# EAGLE board POVnano (EAGLE 7.6.0)
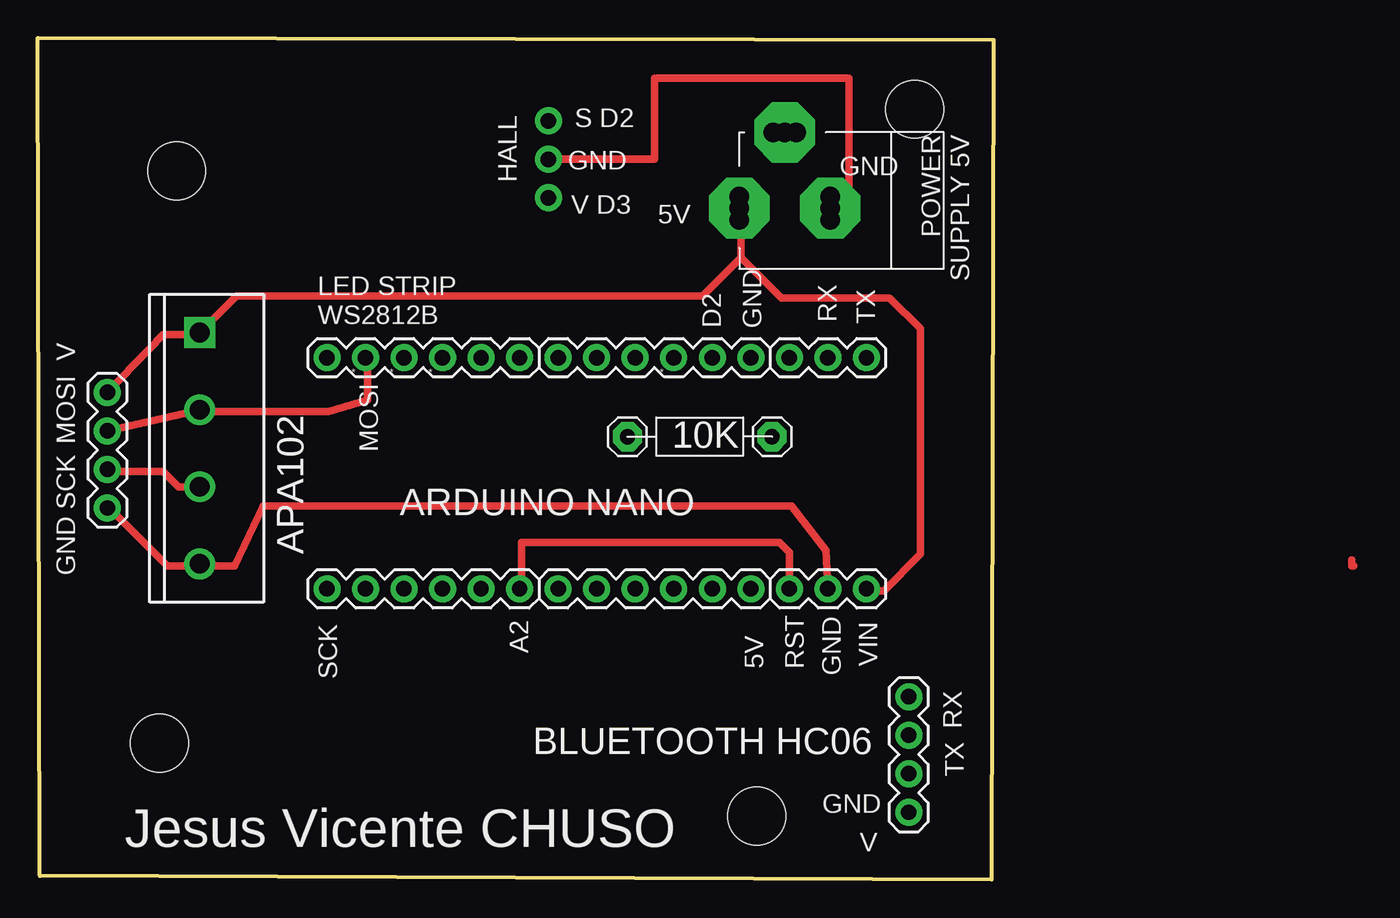
[diagram p0: board, top side]
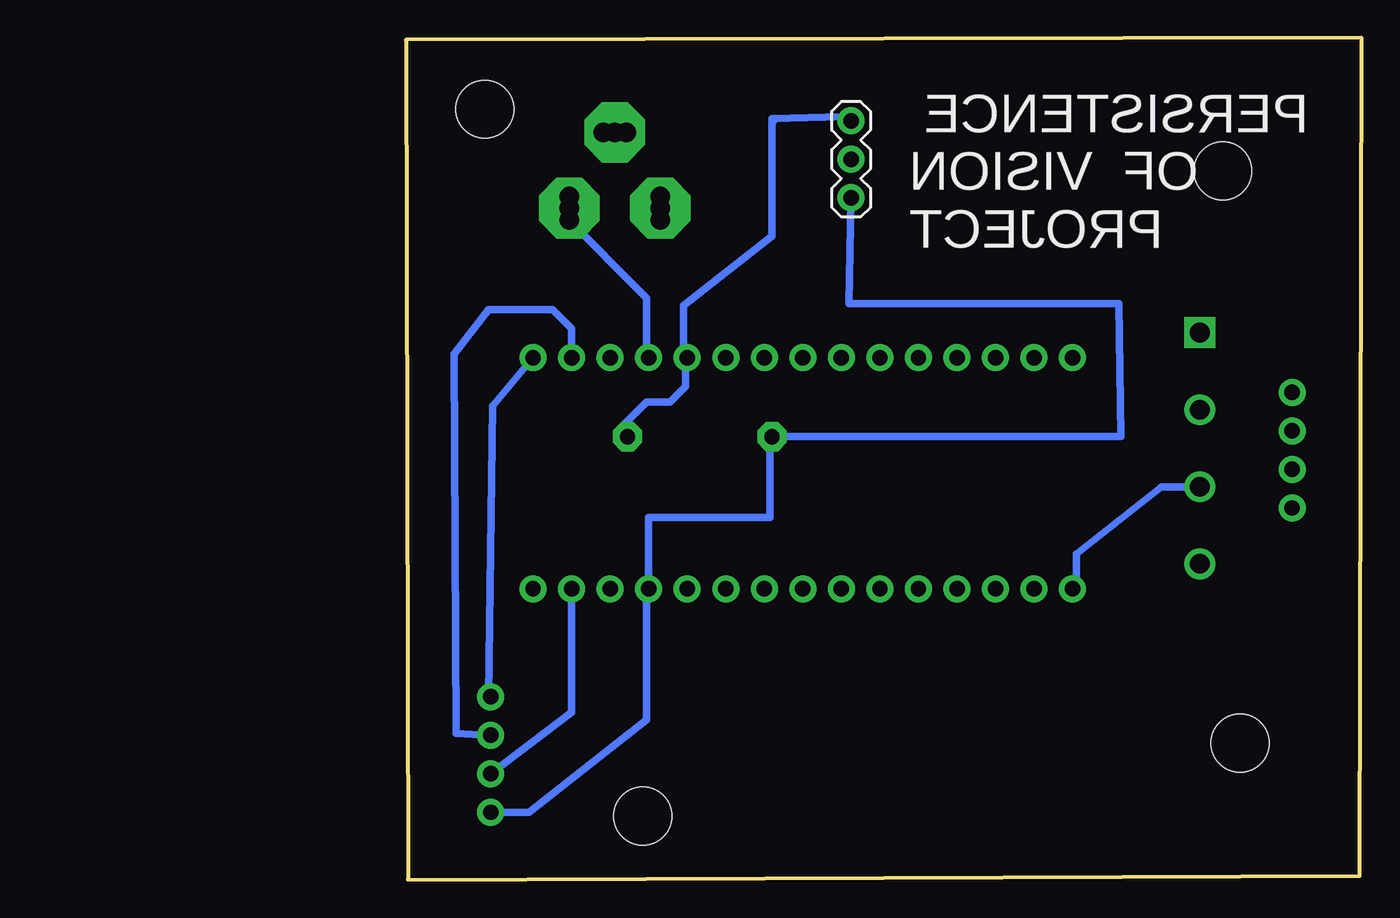
[diagram p1: board, bottom side, seen from below]

Size 62.99 x 55.5 mm. Coordinates in mm from the lower left corner, seen from the top.
Outline: 0,55.5 62.99,55.37 62.86,0 0.13,0.25 0,55.5
Copper layers (1*16): Top 0.035mm / dielectric 1.5mm / Bottom 0.035mm
Design rules "default *": minimum track width 10mil, minimum drill 24mil, track to track 30mil, track to pad 60mil, pad to pad 8mil, via to via 8mil, smd to smd 8mil, copper to edge 40mil, drill to drill 8mil, minimum pad ring 10mil, minimum via ring 8mil, stop-mask expansion 4mil, vias tented up to drill 0mil, thermal gap 10mil
Holes 3.81 mm at 8,9.02 47.37,4.19 9.14,46.74 57.78,50.8

## Footprints (pad centres in the part's own frame; a part is rotated, then mirrored left to right if it is on the bottom)
PIN6UD = drill 1.016 pad 1.778: 1 0,0; 2 2.54,0; 3 5.08,0; 4 7.62,0; 5 10.16,0; 6 12.7,0
PIN3UD = drill 1.016 pad 1.778: 1 0,0; 2 2.54,0; 3 5.08,0
RESISTENCIA_GENERICA = drill 1.016 pad 1.93 octagon: 1 0,0; 2 9.525,0
SCREWBLOCK5MM_4U = drill 1.3 pad 2.032 square: 1 0,0 | drill 1.3 pad 2.032: 2 5.08,0; 3 10.16,0; 5 15.24,0
PIN4UD = drill 1.016 pad 1.778: 1 0,0; 2 2.54,0; 3 5.08,0; 4 7.62,0
POWERSUPPLY_DC-21MM = drill 1.3 pad 4 octagon: 1 -5.08,-3.353; 2 -0.076,-6.35; 3 -0.076,-0.356 | drill 1.3: 4 -5.08,-4.115; 5 -5.08,-2.591; 6 -0.838,-0.356; 7 0.686,-0.356; 8 -0.838,-6.35; 9 0.686,-6.35

## Placement (x,y rotation side)
E$1  [PIN6UD]  19.05,19.18 0 top
E$2  [PIN6UD]  34.29,19.18 0 top
E$3  [PIN6UD]  19.05,34.42 0 top
E$4  [PIN6UD]  34.29,34.42 0 top
E$5  [PIN3UD]  49.53,34.42 0 top
E$6  [PIN3UD]  49.53,19.18 0 top
E$8  [RESISTENCIA_GENERICA]  38.86,29.21 0 top
E$10  [PIN3UD]  33.66,50.04 270 bottom
E$11  [SCREWBLOCK5MM_4U]  10.67,36.07 270 top
E$13  [PIN4UD]  4.57,24.51 90 top
E$14  [PIN4UD]  57.4,4.44 90 top
E$15  [POWERSUPPLY_DC-21MM]  52.58,44.2 270 top

## Library data of the parts
E$1-E$6 E$8 E$10 E$11 E$13 E$14 = chuso
E$15 = SmartPrj

## Nets
S$13: E$1.4
S$20: E$14.1
S$23: E$11.5

## Tracks (layer width: path | path; a pad name or v marks a point on that pad's centre or on a via)
S$1
  Bottom 0.508: 47.12,19.18 46.99,19.18 46.99,23.88 38.99,23.88 38.99,29.21 15.88,29.21 16,37.97 33.78,37.97 33.66,44.83
S$2
  Bottom 0.508: 44.7,34.54 44.7,37.85 38.86,42.42 38.86,50.16 | 38.73,50.04 38.86,50.16 | 38.86,50.16 34.16,50.29 33.91,50.04
S$3
  Bottom 0.508: 52.7,44.7 53.34,44.7
S$4
  Bottom 0.508: 48.64,29.08 48.64,29.97 47.12,31.5 45.59,31.5 44.58,32.51 44.58,34.29 44.32,34.54
S$5
  Top 0.508: 34.42,34.29 34.29,34.29
S$8
  Top 0.508: 46.35,43.18 46.35,41.02 | 46.35,41.02 43.81,38.48 13.08,38.48 10.79,36.2 | 56.01,38.35 49.02,38.35 46.35,41.02
S$10
  Bottom 0.508: 52.58,43.81 47.12,38.35 47.12,34.42 47.24,34.29
S$12
  Bottom 0.508: 54.61,34.42 57.28,31.24 57.53,12.06
S$13
  Top 0.508: E$1.4 26.8,19.18
S$14
  Bottom 0.254: 49.53,34.42 49.66,34.42
S$15
  Bottom 0.508: 26.8,19.18 26.67,19.18
S$16
  Bottom 0.508: 26.54,34.42 26.8,34.42
S$17  (via drill 0.6)
  Bottom 0.508: v21.72,34.29 21.46,34.54
S$18
  Bottom 0.508: 52.07,34.29 52.07,36.32 53.34,37.59 57.53,37.59 59.82,34.67 59.69,9.65 57.53,9.52
S$19
  Bottom 0.508: 52.07,18.92 52.07,11.05 57.4,6.98
S$20
  Bottom 0.508: 47.12,19.05 47.12,10.54 54.86,4.44 E$14.1
S$21
  Top 0.508: 56.13,38.35 58.17,36.32 58.17,21.46 55.75,19.05 54.61,19.05
S$22
  Bottom 0.508: 18.8,19.3 18.8,21.46 13.21,25.91 10.79,25.91
S$23  (via drill 0.6)
  Top 0.508: 52.07,19.18 51.94,21.72 49.66,24.64 14.86,24.64 12.95,20.7 v10.79,20.7
  Bottom 0.508: v10.79,20.7 E$11.5
S$24
  Top 0.508: 10.79,30.86 19.18,30.86 21.72,31.62 21.72,34.29 21.84,34.42
S$25
  Top 0.508: 10.67,20.7 8.51,20.7 4.7,24.51
S$26
  Top 0.508: 10.54,25.91 9.27,25.91 8.25,26.92 4.57,26.92
S$27
  Top 0.508: 10.79,30.99 4.57,29.59
S$28
  Top 0.508: 10.67,35.94 8.25,35.94 4.57,32.13
S$29
  Bottom 0.508: 10.67,36.58 10.67,35.94
S$30
  Top 0.508: 52.58,44.2 53.47,44.2 53.47,52.83 40.64,52.83 40.64,47.5 33.66,47.5 33.66,47.37
S$31
  Top 0.508: 31.88,19.43 31.88,22.22 48.89,22.22 49.53,21.59 49.53,19.3
S$32
  Top 0.508: 86.74,20.7 86.61,20.7 86.61,21.08

## Text on the board
tPlace: * | * | * | *
tNames: S D2 | POWER / SUPPLY 5V | GND | GND | HALL | V D3 | 5V | LED STRIP / WS2812B | RX | TX | D2 | GND | V | MOSI | SCK | MOSI | 10K | ARDUINO NANO | GND | APA102 | SCK | A2 | 5V | RST | VIN | GND | BLUETOOTH HC06 | RX | TX | GND | Jesus Vicente CHUSO | V
bNames: PERSISTENCE / OF VISION / PROJECT